# EAGLE board BSK2+BSK4 (EAGLE 9.4.2)
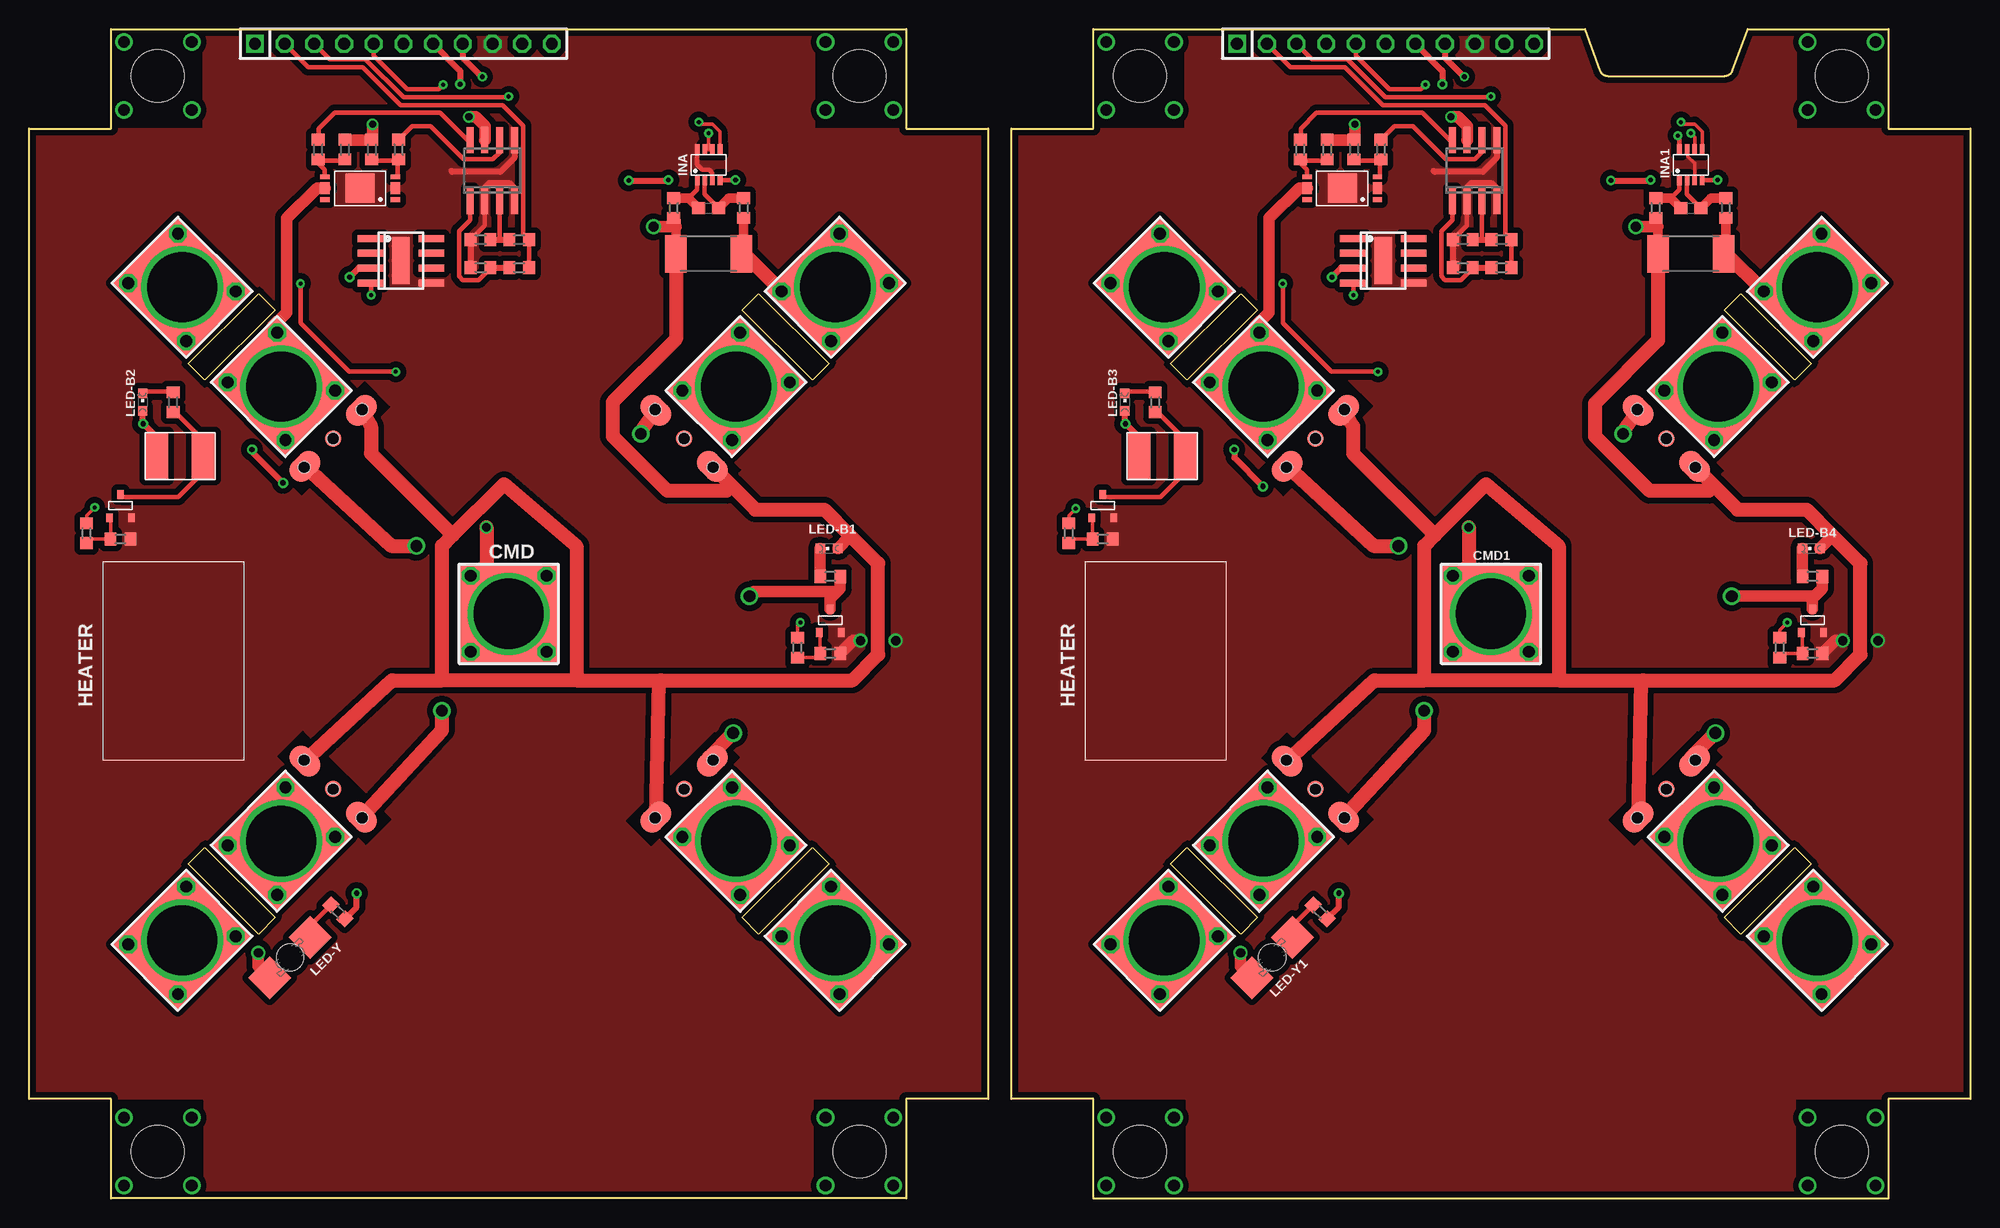
[diagram p0: board, top side]
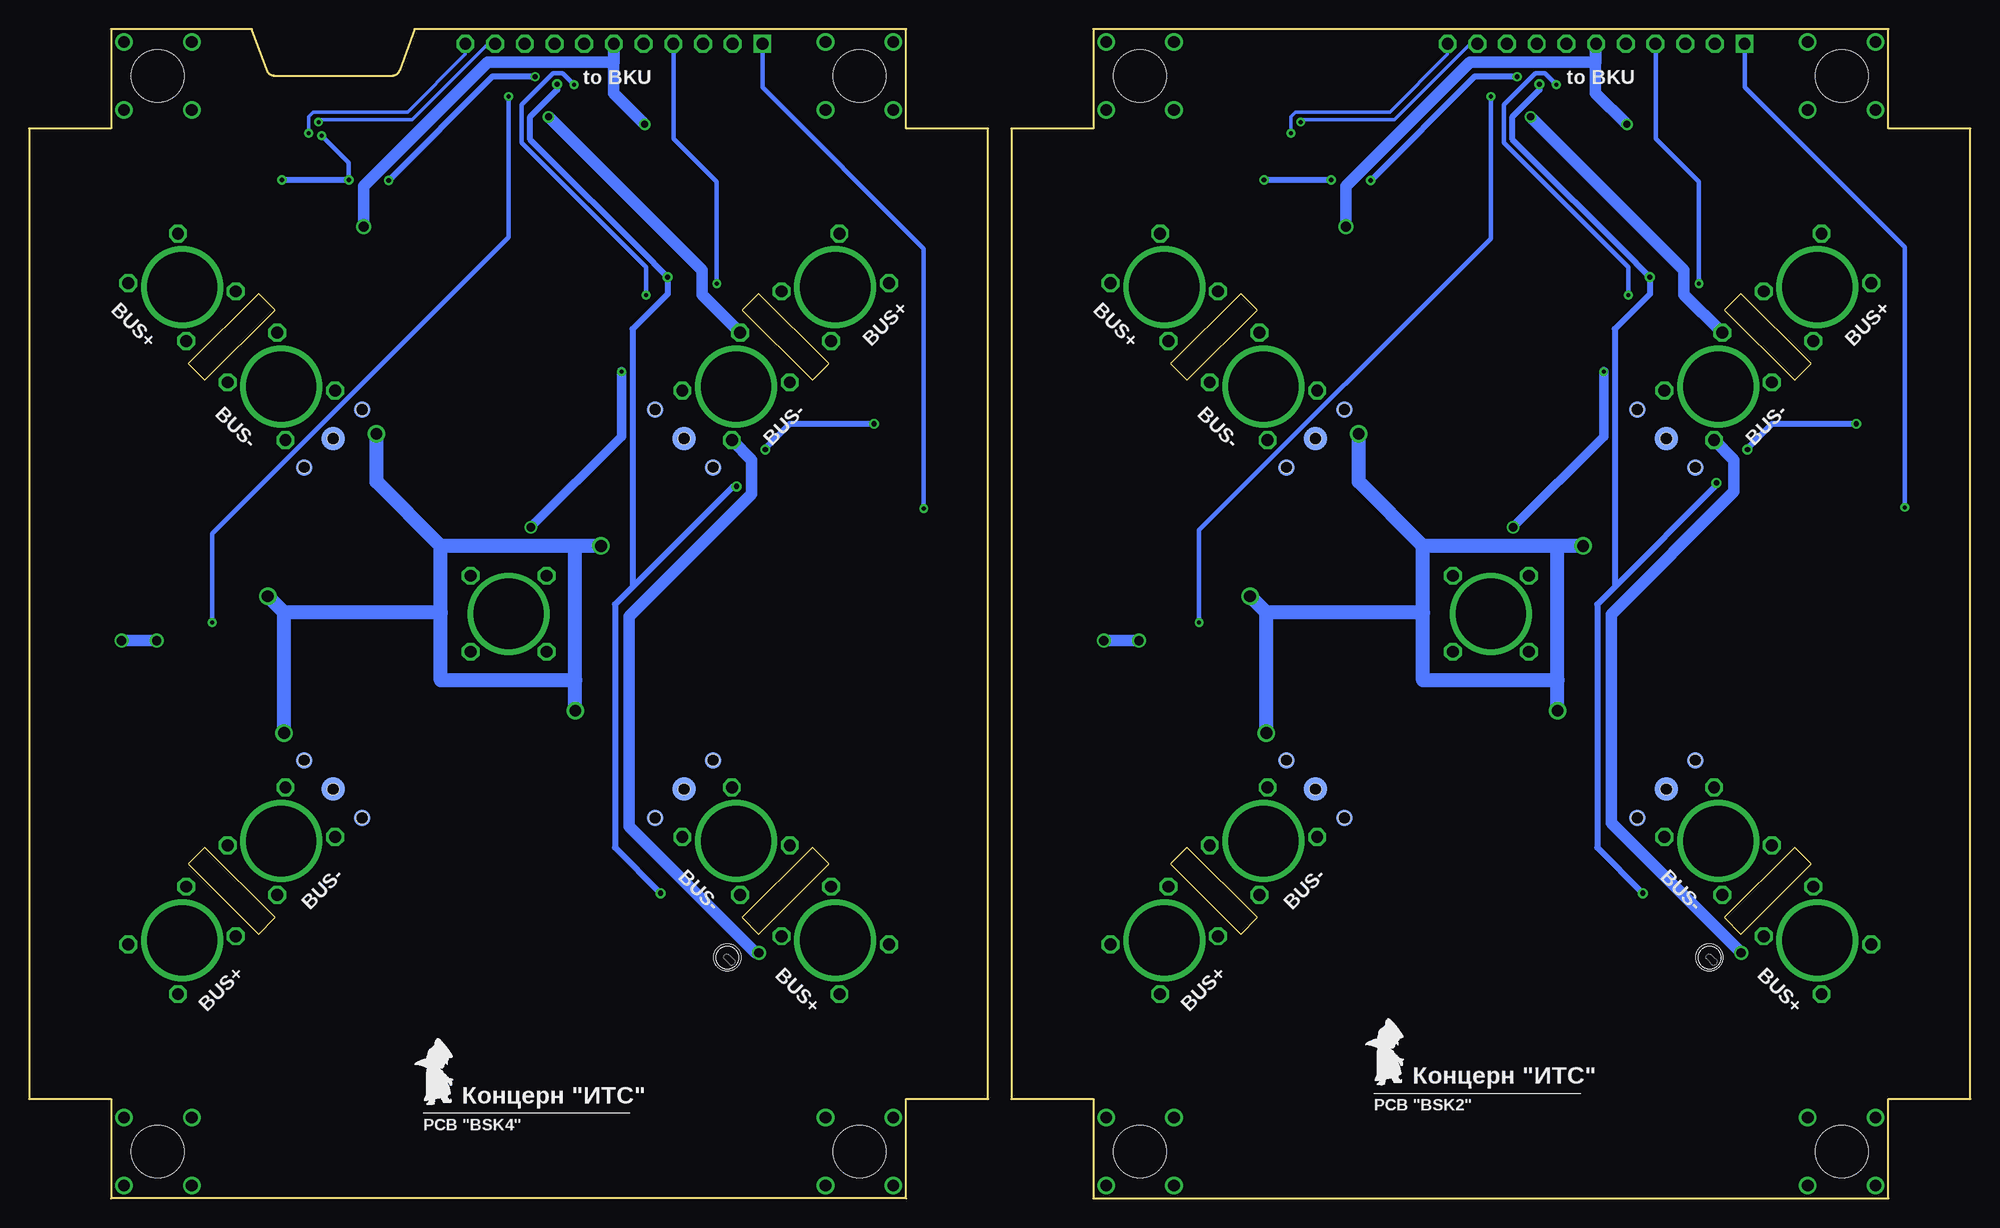
[diagram p1: board, bottom side, seen from below]

Size 166 x 100 mm. Coordinates in mm from the lower left corner, seen from the top.
Outline: 0,8.5 0,91.5 7,91.5 7,100 75,100 75,91.5 82,91.5 82,8.5 75,8.5 75,0 7,0 7,8.5 0,8.5
Outline: 60.98,24.01 66.99,30.02 68.4,28.61 62.39,22.6 60.98,24.01
Outline: 13.6,71.39 19.61,77.4 21.02,75.99 15.01,69.98 13.6,71.39
Outline: 66.99,69.98 60.98,75.99 62.39,77.4 68.4,71.39 66.99,69.98
Outline: 19.61,22.6 13.6,28.61 15.01,30.02 21.02,24.01 19.61,22.6
Outline: 84,8.5 84,91.5 91,91.5 91,100 133.04,100 134.33,96.47 arc70 135,96 145,96 arc70 145.67,96.47 146.96,100 159,100 159,91.5 166,91.5 166,8.5 159,8.5 159,0 91,0 91,8.5 84,8.5
Outline: 144.98,24.01 150.99,30.02 152.4,28.61 146.39,22.6 144.98,24.01
Outline: 97.6,71.39 103.61,77.4 105.02,75.99 99.01,69.98 97.6,71.39
Outline: 150.99,69.98 144.98,75.99 146.39,77.4 152.4,71.39 150.99,69.98
Outline: 103.61,22.6 97.6,28.61 99.01,30.02 105.02,24.01 103.61,22.6
Copper layers (1*16): Top 0.035mm / dielectric 0.93mm / Bottom 0.035mm
Design rules "default *": minimum track width 0.2mm, minimum drill 0.35mm, track to track 0.2mm, track to pad 0.2mm, pad to pad 0.2mm, via to via 0.2mm, smd to smd 0.2mm, copper to edge 0.25mm, drill to drill 0.2mm, minimum pad ring 0.2mm, minimum via ring 0.2mm, stop-mask expansion 2mil, vias tented up to drill 0mil, thermal gap 10mil
Holes 4.5 mm at 11,4 71,4 71,96 11,96 95,4 155,4 155,96 95,96

## Footprints (pad centres in the part's own frame; a part is rotated, then mirrored left to right if it is on the bottom)
1X11 = drill 1.016 square: 1 -12.7,0 | drill 1.016 octagon: 2 -10.16,0; 3 -7.62,0; 4 -5.08,0; 5 -2.54,0; 6 0,0; 7 2.54,0; 8 5.08,0; 9 7.62,0; 10 10.16,0; 11 12.7,0
C0603 = smd 1.1 x 1: 1 -0.85,0; 2 0.85,0
KCONNECT_QUAD = drill 1.016 octagon: 1 -3.25,-3.25; 2 -3.25,3.25; 3 3.25,-3.25; 4 3.25,3.25 | drill 6: P$1 0,0 | smd 8.5 x 8.5: P$2 0,0
SOIC8+HEAT_S = smd 0.6 x 2.2: 1 -1.905,-2.6; 2 -0.635,-2.6; 3 0.635,-2.6; 4 1.905,-2.6; 5 1.905,2.6; 6 0.635,2.6; 7 -0.635,2.6; 8 -1.905,2.6 | smd 4 x 1.5: HEAT 0,0
SOT23-8 = smd 0.9 x 0.4: 1 -1.3,0.975; 2 -1.3,0.325; 3 -1.3,-0.325; 4 -1.3,-0.975; 5 1.3,-0.975; 6 1.3,-0.325; 7 1.3,0.325; 8 1.3,0.975
CHIPLED_0603 = smd 0.8 x 0.8: A 0,-0.75; C 0,0.75
P47F-BOTTOM = smd 2.6 x 2.6: A -2.45,0; C 2.45,0 | hole 2.3: 0,0
SOIC8 = smd 0.6 x 2.2: 1 -1.905,-2.6; 2 -0.635,-2.6; 3 0.635,-2.6; 4 1.905,-2.6; 5 1.905,2.6; 6 0.635,2.6; 7 -0.635,2.6; 8 -1.905,2.6
R0603 = smd 1 x 1.1: 1 -0.85,0; 2 0.85,0
R2512 = smd 1.8 x 3.2: 1 -2.8,0; 2 2.8,0
KCONNECT = drill 1.016 octagon: 1 -3,-3.5; 2 -3,3.5; 3 3,-3.5; 4 3,3.5 | drill 6: P$1 0,0 | smd 8 x 9: P$2 0,0
GRAFIT4_2 = smd 2 x 2 bottom: OUT 0,0 | smd 2 x 2.9: P$1 0,3.4; P$2 0,-3.4 | smd 1.4 x 1.4: P$3 0,0 | smd 1.4 x 1.4 bottom: P$4 0,3.5; P$5 0,-3.5 | hole 1: 0,3.5; 0,0; 0,-3.5
SOT23-3 = smd 0.56 x 0.73: 1 -0.95,-1; 2 0.95,-1; 3 0,1
EM_HEAT = smd 2 x 4: 1 -2,0; 2 2,0
FS8205A+ = smd 0.4 x 0.8: 1 -0.975,-3; 4 0.975,-3; 5 0.975,3; 8 -0.975,3 | smd 1.05 x 0.8: 23 0,-3; 67 0,3 | smd 2.5 x 2.5: HEAT 0,0

## Placement (x,y rotation side)
BKU  [1X11]  32,98.75 0 top
BKU1  [1X11]  116,98.75 0 top
C1  0,1µ  [C0603]  142.1,84.7 0 top
C41  0,1µ  [C0603]  58.1,84.7 0 top
CMD  KCONNECTQUAD  [KCONNECT_QUAD]  41,50 0 top
CMD1  KCONNECTQUAD  [KCONNECT_QUAD]  125,50 0 top
DS18B20Z1  DS18B20Z  [SOIC8+HEAT_S]  31.8,80.2 270 top
DS18B20Z2  DS18B20Z  [SOIC8+HEAT_S]  115.8,80.2 270 top
INA  INA219AID  [SOT23-8]  58.1,88.4 90 top
INA1  INA219AID  [SOT23-8]  142.1,88.4 90 top
LED-B1  [CHIPLED_0603]  68.4,55.6 90 top
LED-B2  [CHIPLED_0603]  9.7,68.1 0 top
LED-B3  [CHIPLED_0603]  93.7,68.1 0 top
LED-B4  [CHIPLED_0603]  152.4,55.6 90 top
LED-Y  LAP4-BOTTOM  [P47F-BOTTOM]  22.3,20.6 225 top
LED-Y1  LAP4-BOTTOM  [P47F-BOTTOM]  106.3,20.6 225 top
MOCD  MOCD  [SOIC8]  39.6,87.9 0 top
R1  2k26  [R0603]  41.9,79.6 0 top
R2  2k26  [R0603]  41.9,82 0 top
R3  100R  [R0603]  65.7,47.1 90 top
R4  2k  [R0603]  26.4,24.5 135 top
R5  100R  [R0603]  24.7,89.7 90 top
R6  100k  [R0603]  27,89.7 270 top
R7  2k  [R0603]  12.3,68.1 270 top
R8  1M  [R0603]  7.8,56.4 0 top
R9  100R  [R0603]  31.6,89.7 90 top
R10  200k  [R0603]  122.6,79.6 0 top
R11  200k  [R0603]  122.6,82 0 top
R12  100k  [R0603]  29.3,89.7 90 top
R13  3k3  [R0603]  68.5,53.2 0 top
R14  1M  [R0603]  68.5,46.6 0 top
R15  100R  [R0603]  115.6,89.7 90 top
R16  100R  [R0603]  108.7,89.7 90 top
R17  100k  [R0603]  111,89.7 270 top
R18  100k  [R0603]  113.3,89.7 90 top
R19  2k  [R0603]  110.4,24.5 135 top
R20  2k  [R0603]  96.3,68.1 270 top
R21  1M  [R0603]  91.8,56.4 0 top
R22  3k3  [R0603]  152.5,53.2 0 top
R23  1M  [R0603]  152.5,46.6 0 top
R24  R01  [R2512]  142.1,80.8 180 top
R25  10R  [R0603]  139.1,84.7 90 top
R26  10R  [R0603]  145.1,84.7 90 top
R27  2k26  [R0603]  125.9,79.6 0 top
R28  2k26  [R0603]  125.9,82 0 top
R29  100R  [R0603]  88.9,56.9 90 top
R30  100R  [R0603]  149.7,47.1 90 top
R32  100R  [R0603]  4.9,56.9 90 top
R75  R01  [R2512]  58.1,80.8 180 top
R76  10R  [R0603]  55.1,84.7 90 top
R77  10R  [R0603]  61.1,84.7 90 top
R94  200k  [R0603]  38.6,79.6 0 top
R95  200k  [R0603]  38.6,82 0 top
U$1  KCONNECT  [KCONNECT]  13.07,77.93 45 top
U$2  KCONNECT  [KCONNECT]  21.55,69.44 45 top
U$3  KCONNECT  [KCONNECT]  68.93,77.93 315 top
U$4  KCONNECT  [KCONNECT]  60.45,69.44 315 top
U$5  KCONNECT  [KCONNECT]  97.07,77.93 45 top
U$6  GRAFITGRAFIT4_2  [GRAFIT4_2]  56,65 45 top
U$7  GRAFITGRAFIT4_2  [GRAFIT4_2]  26,65 135 top
U$8  SI2302CDS  [SOT23-3]  7.8,59.2 0 top
U$9  KCONNECT  [KCONNECT]  13.07,22.07 135 top
U$10  KCONNECT  [KCONNECT]  21.55,30.55 135 top
U$11  KCONNECT  [KCONNECT]  68.93,22.07 225 top
U$12  KCONNECT  [KCONNECT]  60.45,30.55 225 top
U$13  SI2302CDS  [SOT23-3]  68.5,49.4 0 top
U$14  EM_HEAT  [EM_HEAT]  12.9,63.5 0 top
U$15  GRAFITGRAFIT4_2  [GRAFIT4_2]  56,35 315 top
U$16  GRAFITGRAFIT4_2  [GRAFIT4_2]  26,35 225 top
U$17  PCB "BSK2"  [ITS-LOGO]  51,9 0 bottom
U$18  KCONNECT  [KCONNECT]  105.56,30.55 135 top
U$19  KCONNECT  [KCONNECT]  152.93,22.07 225 top
U$20  KCONNECT  [KCONNECT]  144.44,30.55 225 top
U$21  KCONNECT  [KCONNECT]  105.56,69.44 45 top
U$22  KCONNECT  [KCONNECT]  152.93,77.93 315 top
U$23  KCONNECT  [KCONNECT]  144.44,69.44 315 top
U$24  KCONNECT  [KCONNECT]  97.07,22.07 135 top
U$25  FS8205A+  [FS8205A+]  112.3,86.4 90 top
U$26  FS8205A+  [FS8205A+]  28.3,86.4 90 top
U$27  MOCD  [SOIC8]  123.6,87.9 0 top
U$28  SI2302CDS  [SOT23-3]  91.8,59.2 0 top
U$29  EM_HEAT  [EM_HEAT]  96.9,63.5 0 top
U$30  SI2302CDS  [SOT23-3]  152.5,49.4 0 top
U$31  GRAFITGRAFIT4_2  [GRAFIT4_2]  140,65 45 top
U$32  GRAFITGRAFIT4_2  [GRAFIT4_2]  110,65 135 top
U$33  GRAFITGRAFIT4_2  [GRAFIT4_2]  140,35 315 top
U$34  GRAFITGRAFIT4_2  [GRAFIT4_2]  110,35 225 top
U$35  PCB "BSK4"  [ITS-LOGO]  132.3,7.3 0 bottom

## Library data of the parts
BKU BKU1 = pinheadCS
C1 C41 = rcl; SPICEPREFIX: C
CMD CMD1 DS18B20Z1 DS18B20Z2 INA INA1 MOCD U$1-U$35 = CanCubeSat
LED-B1-LED-B4 LED-Y LED-Y1 = led
R1-R23 R25-R30 R32 R76 R77 R94 R95 = resistor
R24 R75 = rcl; SPICEPREFIX: R

## Nets
1: R7.2 U$8.3 U$14.2
1W: BKU.5 DS18B20Z1.4
1W1: BKU1.5 DS18B20Z2.4
2: R13.2 U$6.P$1 U$6.P$4 U$7.P$1 U$7.P$4 U$13.3 U$15.P$1 U$15.P$4 U$16.P$1 U$16.P$4
3: R20.2 U$28.3 U$29.2
3V1: BKU1.8 INA1.4 INA1.8
3V3: BKU.8 INA.4
4: R22.2 U$30.3 U$31.P$1 U$31.P$4 U$32.P$1 U$32.P$4 U$33.P$1 U$33.P$4 U$34.P$1 U$34.P$4
5V: BKU.7 DS18B20Z1.3 LED-B2.A R4.1 U$14.1
5V1: BKU1.7 DS18B20Z2.3 LED-B3.A R19.1 U$29.1
B2-CMD: BKU.4 CMD.1 CMD.2 CMD.3 CMD.4 CMD.P$1 CMD.P$2
B2-KHEAT: BKU.1 R32.2
B2-KVCC: BKU.2 R1.2 R2.2
B2-ROZE: BKU.3 R3.2
B4-CMD: BKU1.4 CMD1.1 CMD1.2 CMD1.3 CMD1.4 CMD1.P$1 CMD1.P$2
B4-KHEAT: BKU1.1 R29.2
B4-KVCC: BKU1.2 R27.2 R28.2
B4-ROZE: BKU1.3 R30.2
BUS+: BKU.6 LED-B1.A R6.1 R12.2 R75.2 R76.1 U$6.P$2 U$6.P$5 U$7.P$2 U$7.P$5 U$15.P$2 U$15.P$5 U$16.P$2 U$16.P$5
BUS+1: BKU1.6 LED-B4.A R17.1 R18.2 R24.2 R25.1 U$31.P$2 U$31.P$5 U$32.P$2 U$32.P$5 U$33.P$2 U$33.P$5 U$34.P$2 U$34.P$5
GND: BKU.9 DS18B20Z1.5 DS18B20Z1.HEAT INA.3 INA.8 MOCD.2 MOCD.4 MOCD.5 R8.2 R14.2 R94.1 R95.1 U$8.2 U$13.2 U$26.23 U$26.HEAT
GND4: BKU1.9 DS18B20Z2.5 DS18B20Z2.HEAT INA1.3 INA1.7 R10.1 R11.1 R21.2 R23.2 U$25.23 U$25.HEAT U$27.2 U$27.4 U$27.5 U$28.2 U$30.2
N$17: MOCD.1 R1.1 R94.2
N$18: MOCD.3 R2.1 R95.2
N$19: R8.1 R32.1 U$8.1
N$20: R3.1 R14.1 U$13.1
N$21: R16.1 R17.2 U$25.5
N$22: R15.1 R18.1 U$25.4
N$23: LED-Y1.A R19.2
N$24: LED-B3.C R20.1
N$25: LED-B4.C R22.1
N$26: R5.1 R6.2 U$26.5
N$27: R9.1 R12.1 U$26.4
N$28: LED-Y.A R4.2
N$29: LED-B1.C R13.1
N$31: LED-B2.C R7.1
N$47: C1.1 INA1.1 R25.2
N$48: C1.2 INA1.2 R26.2
N$49: R10.2 R27.1 U$27.1
N$50: R11.2 R28.1 U$27.3
N$51: R21.1 R29.1 U$28.1
N$52: R23.1 R30.1 U$30.1
N$150: C41.1 INA.1 R76.2
N$151: C41.2 INA.2 R77.2
OC1: MOCD.6 R9.2
OC2: R15.2 U$27.6
OD1: MOCD.8 R5.2
OD2: R16.2 U$27.8
SCL-TM: BKU.10 INA.5
SCL-TM1: BKU1.10 INA1.5
SDA-TM: BKU.11 INA.6 INA.7
SDA-TM1: BKU1.11 INA1.6
SP+: R75.1 R77.1 U$3.1 U$3.2 U$3.3 U$3.4 U$3.P$1 U$3.P$2
SP+1: U$1.1 U$1.2 U$1.3 U$1.4 U$1.P$1 U$1.P$2
SP+2: U$9.1 U$9.2 U$9.3 U$9.4 U$9.P$1 U$9.P$2
SP+3: U$11.1 U$11.2 U$11.3 U$11.4 U$11.P$1 U$11.P$2
SP+4: U$5.1 U$5.2 U$5.3 U$5.4 U$5.P$1 U$5.P$2
SP+5: U$24.1 U$24.2 U$24.3 U$24.4 U$24.P$1 U$24.P$2
SP+6: U$19.1 U$19.2 U$19.3 U$19.4 U$19.P$1 U$19.P$2
SP+7: R24.1 R26.1 U$22.1 U$22.2 U$22.3 U$22.4 U$22.P$1 U$22.P$2
SP-: LED-Y.C MOCD.7 U$2.1 U$2.2 U$2.3 U$2.4 U$2.P$1 U$2.P$2 U$26.67
SP-1: U$4.1 U$4.2 U$4.3 U$4.4 U$4.P$1 U$4.P$2
SP-2: U$10.1 U$10.2 U$10.3 U$10.4 U$10.P$1 U$10.P$2
SP-3: U$12.1 U$12.2 U$12.3 U$12.4 U$12.P$1 U$12.P$2
SP-4: U$23.1 U$23.2 U$23.3 U$23.4 U$23.P$1 U$23.P$2
SP-5: U$18.1 U$18.2 U$18.3 U$18.4 U$18.P$1 U$18.P$2
SP-6: U$20.1 U$20.2 U$20.3 U$20.4 U$20.P$1 U$20.P$2
SP-7: LED-Y1.C U$21.1 U$21.2 U$21.3 U$21.4 U$21.P$1 U$21.P$2 U$25.67 U$27.7

## Tracks (layer width: path | path; a pad name or v marks a point on that pad's centre or on a via)
1
  Top 0.4: 14.75,63.5 14.75,62 12.75,60 8,60 U$8.3 | 14.75,63.5 14.75,65 12.5,67.25 R7.2 | 14.75,63.5 U$14.2
1W  (via drill 0.35)
  Top 0.4: v29.25,77.25 29.25,78.25 DS18B20Z1.4 | v35.4,95.25 35,94.85 32.33,94.85 29.46,97.72 BKU.5
  Bottom 0.4: v29.25,77.25 29.25,79.65 39.9,90.3 39.9,93.55 37.2,96.25 36.4,96.25 v35.4,95.25
1W1  (via drill 0.35)
  Top 0.4: v113.25,77.25 113.25,78.25 DS18B20Z2.4 | v119.4,95.25 119,94.85 116.33,94.85 113.46,97.72 BKU1.5
  Bottom 0.4: v113.25,77.25 113.25,79.65 123.9,90.3 123.9,93.55 121.2,96.25 120.4,96.25 v119.4,95.25
2  (via drill 1)
  Top 1: R13.2 69.35,52.15 69.1,51.9 | v61.6,51.5 62,51.9 69.1,51.9 | 69.1,51.9 68.5,51.3 U$13.3
  Top 1.2: U$15.P$1 58.12,37.72 v60.2,39.8 | U$16.P$1 35.3,40.06 v35.3,41.7 | U$7.P$1 30.96,55.8 v33.1,55.8 | U$6.P$1 52.3,65.54 v52.3,65.4
  Bottom 1.2: 35.3,44.3 35.3,55.8 | 35.3,44.3 46.8,44.3 46.8,50.1 | 46.8,50.1 46.8,55.8 | v60.2,39.8 60.2,50.1 | 60.2,50.1 v61.6,51.5 | 46.8,50.1 60.2,50.1 | 35.3,55.8 46.8,55.8 | v35.3,41.7 35.3,44.3 | v33.1,55.8 35.3,55.8 | 46.8,55.8 52.3,61.3 v52.3,65.4
3
  Top 0.4: 98.75,63.5 98.75,62 96.75,60 92,60 U$28.3 | 98.75,63.5 98.75,65 96.5,67.25 R20.2 | 98.75,63.5 U$29.2
3V1  (via drill 0.35, 0.4)
  Top 0.4: INA1.4 v144.4,87.1 | INA1.8 141.12,90.78 v141,90.9
  Top 0.5: BKU1.8 121.08,97.55 122.72,95.92 v122.74,95.94 | v135.27,87.07 138.64,87.07 v138.67,87.1
  Bottom 0.4: v141,90.9 138.67,88.57 v138.67,87.1
  Bottom 0.5: v138.67,87.1 v144.4,87.1 | v122.74,95.94 126.39,95.94 v135.27,87.07
3V3  (via drill 0.4)
  Top 0.4: INA.4 v60.4,87.1
  Top 0.5: BKU.8 37.08,97.55 38.72,95.92 v38.74,95.94 | v51.27,87.07 54.64,87.07 v54.67,87.1
  Bottom 0.5: v54.67,87.1 v60.4,87.1 | v38.74,95.94 42.39,95.94 v51.27,87.07
4  (via drill 1)
  Top 1: R22.2 153.35,52.15 152.7,51.5 | v145.6,51.5 152.7,51.5 | 152.7,51.5 152.5,51.3 U$30.3
  Top 1.2: U$33.P$1 142.12,37.72 v144.2,39.8 | U$34.P$1 119.3,40.06 v119.3,41.7 | U$32.P$1 114.96,55.8 v117.1,55.8 | U$31.P$1 136.3,65.54 v136.3,65.4
  Bottom 1.2: 119.3,44.3 119.3,55.8 | 119.3,44.3 130.8,44.3 130.8,50.1 | 130.8,50.1 130.8,55.8 | v144.2,39.8 144.2,50.1 | 144.2,50.1 v145.6,51.5 | 130.8,50.1 144.2,50.1 | 119.3,55.8 130.8,55.8 | v119.3,41.7 119.3,44.3 | v117.1,55.8 119.3,55.8 | 130.8,55.8 136.3,61.3 v136.3,65.4
5V  (via drill 0.45)
  Top 0.5: R4.1 28,24.9 v28,26.1 | v21.7,61.2 19.05,63.85 v19.05,64.05 | v27.4,78.8 28.16,79.56 DS18B20Z1.3 | BKU.7 36.79,96.5 36.85,96.47 v36.85,95.3 | LED-B2.A 9.7,66.3 v9.75,66.25 10.9,65.1 U$14.1
  Bottom 0.5: v28,26.1 31.9,30 31.9,50.8 30.4,52.3 | 30.4,52.3 21.7,61 v21.7,61.2 | v36.85,95.3 36.85,94.82 39.15,92.52 39.15,90.57 28.6,80.02 28.6,80 v27.4,78.8 27.4,77.35 30.4,74.35 30.4,52.3 | v19.05,64.05 19.05,64.15 16.95,66.25 v9.75,66.25
5V1  (via drill 0.45)
  Top 0.5: R19.1 112,24.9 v112,26.1 | v105.5,60.9 103.05,63.35 v103.05,64.05 | v111.4,78.8 112.17,79.56 DS18B20Z2.3 | BKU1.7 120.79,96.5 120.85,96.47 v120.85,95.3 | LED-B3.A 93.7,66.3 v93.75,66.25 94.9,65.1 U$29.1
  Bottom 0.5: v112,26.1 115.9,30 115.9,50.8 114.4,52.3 | 114.4,52.3 105.8,60.9 v105.5,60.9 | v120.85,95.3 120.85,94.82 123.15,92.52 123.15,90.57 112.6,80.02 112.6,80 v111.4,78.8 111.4,77.35 114.4,74.35 114.4,52.3 | v103.05,64.05 103.05,64.15 100.95,66.25 v93.75,66.25
B2-CMD  (via drill 0.35, 0.7)
  Top 0.4: CMD.P$1 CMD.1 | CMD.P$1 CMD.2 | CMD.P$1 CMD.3 | CMD.P$1 CMD.4 | v31.35,70.7 27.35,70.7 23.2,74.85 v23.2,78.25
  Top 1.2: v39.1,57.4 39.1,54.1 CMD.2
  Bottom 0.4: BKU.4 26.9,98.73 26.9,90.65 23.2,86.95 v23.2,78.25
  Bottom 0.8: v39.1,57.4 31.35,65.15 v31.35,70.7
B2-KHEAT  (via drill 0.35)
  Top 0.3: R32.2 4.9,58.4 v5.6,59.1
  Bottom 0.4: v5.6,59.1 5.6,81.35 19.3,95.05 BKU.1
B2-KVCC
  Top 0.4: BKU.2 23.84,96.75 28.5,96.75 31.75,93.5 40.5,93.5 42.25,91.75 42.25,82.5 R2.2 R1.2
B2-ROZE  (via drill 0.35)
  Top 0.3: R3.2 65.7,49 v65.95,49.25
  Top 0.4: v41,94.25 40.95,94.2 32,94.2 28.75,97.45 25.68,97.45 BKU.3
  Bottom 0.4: v65.95,49.25 65.95,57.15 41,82.1 v41,94.25
B4-CMD  (via drill 0.35, 0.7)
  Top 0.4: CMD1.P$1 CMD1.1 | CMD1.P$1 CMD1.2 | CMD1.P$1 CMD1.3 | CMD1.P$1 CMD1.4 | v115.35,70.7 111.35,70.7 107.2,74.85 v107.2,78.25
  Top 1.2: v123.1,57.4 123.1,54.1 CMD1.2
  Bottom 0.4: BKU1.4 110.9,98.73 110.9,90.65 107.2,86.95 v107.2,78.25
  Bottom 0.8: v123.1,57.4 115.35,65.15 v115.35,70.7
B4-KHEAT  (via drill 0.35)
  Top 0.3: v89.5,59 88.9,58.4 R29.2
  Bottom 0.4: v89.5,59 89.5,81.25 103.3,95.05 BKU1.1
B4-KVCC
  Top 0.4: BKU1.2 107.84,96.75 112.5,96.75 115.75,93.5 124.5,93.5 126.25,91.75 126.25,82.5 R28.2 R27.2
B4-ROZE  (via drill 0.35)
  Top 0.3: v150.35,49.25 149.7,48.6 R30.2
  Top 0.4: v125,94.25 124.95,94.2 116,94.2 112.75,97.45 109.68,97.45 BKU1.3
  Bottom 0.4: v150.35,49.25 150.35,56.85 125,82.2 v125,94.25
BUS+  (via drill 0.6, 0.85)
  Top 0.4: 27,90.5 R6.1 | R12.2 29.25,90.5
  Top 0.8: R75.2 55.3,83.1 55.3,83.65 R76.1
  Top 1: v29.35,91.86 29.35,90.6 29.25,90.5 27,90.5 | 70.1,56.8 70.1,56.55 LED-B1.A | v53.4,83.1 55.3,83.1
  Top 1.2: 35.3,44.3 35.3,55.8 36.22,56.72 | 46.8,44.3 35.3,44.3 | 46.8,44.3 46.8,55.78 40.59,61.09 36.22,56.72 | 46.8,44.3 54,44.3 | 54,44.3 70.4,44.3 72.6,46.5 72.6,54.3 70.1,56.8 68,58.9 62.1,58.9 60.05,60.95 | U$7.P$2 29.22,66.02 29.22,63.72 36.22,56.72 | U$6.P$2 60.05,60.95 | U$15.P$2 53.88,44.18 54,44.3 | U$16.P$2 31.06,44.3 35.3,44.3 | R75.2 55.3,73.5 49.9,68.1 49.9,65.2 54.6,60.5 59.6,60.5 60.05,60.95
  Bottom 1: v29.35,91.86 29.38,91.86 32.05,94.52 32.05,98.7 BKU.6 32,97.19 42.8,97.19 53.4,86.59 v53.4,83.1
BUS+1  (via drill 0.6, 0.85)
  Top 0.4: 111,90.5 R17.1 | R18.2 113.25,90.5
  Top 0.8: R24.2 139.3,83.1 139.3,83.65 R25.1
  Top 1: v113.35,91.86 113.35,90.6 113.25,90.5 111,90.5 | 154.1,56.8 154.1,56.55 LED-B4.A | v137.4,83.1 139.3,83.1
  Top 1.2: 119.3,44.3 119.3,55.8 120.22,56.72 | 130.8,44.3 119.3,44.3 | 130.8,44.3 130.8,55.78 124.59,61.09 120.22,56.72 | 130.8,44.3 138,44.3 | 138,44.3 154.4,44.3 156.6,46.5 156.6,54.3 154.1,56.8 152,58.9 146.1,58.9 144.05,60.95 | U$32.P$2 113.22,66.02 113.22,63.72 120.22,56.72 | U$31.P$2 144.05,60.95 | U$33.P$2 137.88,44.18 138,44.3 | U$34.P$2 115.06,44.3 119.3,44.3 | R24.2 139.3,73.4 133.9,68 133.9,65.2 138.6,60.5 143.6,60.5 144.05,60.95
  Bottom 1: v113.35,91.86 113.38,91.86 116.05,94.52 116.05,98.7 BKU1.6 116,97.19 126.8,97.19 137.4,86.59 v137.4,83.1
GND  (via drill 0.8)
  Top 0.4: INA.8 57.12,88.4 57.55,87.97 58.15,87.97 58.4,87.72 58.4,87.13 INA.3 | MOCD.2 38.97,83.22 R95.1
  Top 0.5: MOCD.5 41.51,89 40.3,87.8 36.2,87.8 36.1,87.9 | MOCD.2 38.97,86.47 39.37,86.87 41.03,86.87 41.51,86.39 MOCD.4 | R95.1 R94.1
  Top 1: R14.2 70.45,47.7 v71.1,47.7
  Bottom 1: v71.1,47.7 v74.1,47.7
  cutout Top: 13.09,71.3 14.99,69.4 21.59,76 19.69,77.9
  pour Top (isolate 0.5, no thermals): 0,91.5 14.9,91.5 14.9,100 49.37,100 62.9,100 67.1,100 67.1,91.5 82,91.5 82,8.5 67,8.5 67,0 15,0 15,8.4 14.9,8.5 0,8.5
  cutout Top (no thermals): 21.2,62.3 28.7,69.8 30.8,67.7 23.3,60.2
GND1
  cutout Top (no thermals): 58.7,60.2 51.2,67.7 53.3,69.8 60.8,62.3
GND2
  cutout Top (no thermals): 51.1,32.3 58.6,39.8 60.7,37.7 53.2,30.2
GND3
  cutout Top (no thermals): 28.8,30.3 21.3,37.8 23.4,39.9 30.9,32.4
GND4  (via drill 0.8)
  Top 0.3: INA1.7 141.85,89.62 141.85,89.1 142.43,88.53 INA1.3
  Top 0.4: U$27.2 122.97,83.22 R11.1
  Top 0.5: U$27.5 125.5,89 124.3,87.8 120.2,87.8 120.1,87.9 | U$27.2 122.97,86.47 123.37,86.87 125.03,86.87 125.5,86.39 U$27.4 | R11.1 R10.1
  Top 1: R23.2 154.45,47.7 v155.1,47.7
  Bottom 1: v155.1,47.7 v158.1,47.7
  cutout Top: 97.09,71.3 98.99,69.4 105.59,76 103.69,77.9
  pour Top (isolate 0.5, no thermals): 84,91.5 98.9,91.5 98.9,100 133.1,100 133.1,99.5 133.5,99.1 133.5,98.4 133.8,98.1 133.8,97.5 134.2,97.1 134.2,96.6 134.8,96 145.2,96 145.8,96.6 145.8,97.1 146.1,97.4 146.1,97.9 146.4,98.2 146.4,98.7 146.7,99 146.7,99.5 146.9,99.7 146.9,100 151.1,100 151.1,91.5 166,91.5 166,8.5 151,8.5 151,0 99,0 99,8.4 98.9,8.5 84,8.5
  cutout Top (no thermals): 105.15,62.25 112.75,69.85 114.85,67.75 107.25,60.15
GND5
  cutout Top (no thermals): 142.75,60.15 135.2,67.7 137.3,69.8 144.85,62.25
GND6
  cutout Top (no thermals): 135.15,32.35 142.65,39.85 144.75,37.75 137.25,30.25
GND7
  cutout Top (no thermals): 112.8,30.3 105.45,37.65 107.55,39.75 114.9,32.4
HEAT1
  cutout Top: 60.45,24.07 62.45,22.07 68.95,28.57 66.95,30.57
HEAT2
  cutout Top: 66.93,69.45 68.93,71.45 62.43,77.95 60.43,75.95
HEAT3
  cutout Top: 19.54,22.07 21.54,24.07 15.04,30.57 13.04,28.57
HEAT4
  cutout Top: 144.45,24.07 146.45,22.07 152.95,28.57 150.95,30.57
HEAT5
  cutout Top: 150.93,69.45 152.93,71.45 146.43,77.95 144.43,75.95
HEAT6
  cutout Top: 103.54,22.07 105.54,24.07 99.04,30.57 97.04,28.57
N$1  (via drill 1)
  other vias: 68.1,6.9
N$2  (via drill 1)
  other vias: 68.1,1.1
N$3  (via drill 1)
  other vias: 73.9,1.1
N$4  (via drill 1)
  other vias: 73.9,6.9
N$5  (via drill 1)
  other vias: 8.1,98.9
N$6  (via drill 1)
  other vias: 8.1,93.1
N$7  (via drill 1)
  other vias: 13.9,93.1
N$8  (via drill 1)
  other vias: 13.9,98.9
N$9  (via drill 1)
  other vias: 68.1,98.9
N$10  (via drill 1)
  other vias: 68.1,93.1
N$11  (via drill 1)
  other vias: 8.1,6.9
N$12  (via drill 1)
  other vias: 8.1,1.1
N$13  (via drill 1)
  other vias: 13.9,1.1
N$14  (via drill 1)
  other vias: 13.9,6.9
N$15  (via drill 1)
  other vias: 73.9,93.1
N$16  (via drill 1)
  other vias: 73.9,98.9
N$17
  Top 0.4: MOCD.1 37.7,83.66 36.75,82.72 36.75,78.88 37.08,78.55 38.42,78.55 39.45,79.58 R94.2
  Top 0.5: R94.2 R1.1
N$18
  Top 0.4: MOCD.3 40.23,82.03 40.2,82
  Top 0.5: R95.2 40.2,82 R2.1
N$19
  Top 0.3: U$8.1 6.95,58.1 R8.1 5.25,56.4 R32.1
N$20
  Top 0.3: U$13.1 67.65,48.3 R14.1 67.3,46.25 R3.1
N$21
  Top 0.4: U$25.5 109.25,87.5 109.25,88 108.5,88.75 R16.1 108.75,88.75 111,88.75 R17.2
N$22
  Top 0.4: 115.5,88.75 115.5,87.5 U$25.4 | 115.5,88.75 113.5,88.75 R18.1 | 115.5,88.75 R15.1
N$23
  Top 0.4: R19.2 109.75,25 108.25,23.5 108.25,22.5 LED-Y1.A
N$24
  Top 0.4: LED-B3.C 93.75,69 96.25,69 R20.1
N$25
  Top 1: LED-B4.C R22.1
N$26
  Top 0.4: U$26.5 25.25,87.5 25.25,88 24.5,88.75 R5.1 24.75,88.75 27,88.75 R6.2
N$27
  Top 0.4: 31.5,88.75 31.5,87.5 U$26.4 | 31.5,88.75 29.5,88.75 R12.1 | 31.5,88.75 R9.1
N$28
  Top 0.4: R4.2 25.75,25 24.25,23.5 24.25,22.5 LED-Y.A
N$29
  Top 1: LED-B1.C R13.1
N$30  (via drill 1)
  other vias: 92.1,6.9
N$31
  Top 0.4: LED-B2.C 9.75,69 12.25,69 R7.1
N$32  (via drill 1)
  other vias: 92.1,1.1
N$33  (via drill 1)
  other vias: 97.9,1.1
N$34  (via drill 1)
  other vias: 97.9,6.9
N$35  (via drill 1)
  other vias: 152.1,6.9
N$36  (via drill 1)
  other vias: 152.1,1.1
N$37  (via drill 1)
  other vias: 157.9,1.1
N$38  (via drill 1)
  other vias: 157.9,6.9
N$39  (via drill 1)
  other vias: 92.1,98.9
N$40  (via drill 1)
  other vias: 92.1,93.1
N$41  (via drill 1)
  other vias: 97.9,93.1
N$42  (via drill 1)
  other vias: 97.9,98.9
N$43  (via drill 1)
  other vias: 152.1,98.9
N$44  (via drill 1)
  other vias: 152.1,93.1
N$45  (via drill 1)
  other vias: 157.9,93.1
N$46  (via drill 1)
  other vias: 157.9,98.9
N$47
  Top 0.4: INA1.1 141.12,86.28 140.4,85.55
  Top 0.8: R25.2 140.4,85.55 C1.1
N$48
  Top 0.4: INA1.2 141.78,85.88 C1.2
  Top 0.8: R26.2 143.8,85.55 C1.2
N$49
  Top 0.4: U$27.1 121.69,83.66 120.75,82.72 120.75,78.88 121.08,78.55 122.42,78.55 123.45,79.58 R10.2
  Top 0.5: R10.2 R27.1
N$50
  Top 0.4: U$27.3 124.23,82.03 124.2,82
  Top 0.5: R11.2 124.2,82 R28.1
N$51
  Top 0.3: U$28.1 90.95,58.1 R21.1 89.25,56.4 R29.1
N$52
  Top 0.3: U$30.1 151.65,48.3 R23.1 150.05,46.6 R30.1
N$150
  Top 0.4: INA.1 57.12,86.28 56.4,85.55
  Top 0.8: R76.2 56.4,85.55 C41.1
N$151
  Top 0.4: INA.2 57.77,85.88 C41.2
  Top 0.8: R77.2 59.8,85.55 C41.2
OC1
  Top 0.4: R9.2 32.75,91.7 34.35,91.7 37.15,88.9 39.65,88.9 40.25,89.5 40.25,90.5 MOCD.6
OC2
  Top 0.4: R15.2 116.75,91.7 118.35,91.7 121.15,88.9 123.65,88.9 124.25,89.5 124.25,90.5 U$27.6
OD1
  Top 0.4: R5.2 24.75,90.75 24.75,91.5 26.1,92.85 35.15,92.85 37.5,90.5 MOCD.8
OD2
  Top 0.4: R16.2 108.75,90.75 108.75,91.5 110.1,92.85 119.15,92.85 121.5,90.5 U$27.8
SCL-TM  (via drill 0.35)
  Top 0.3: v57.26,92.06 57.43,91.89 58.43,91.89 59.08,91.25 INA.5
  Bottom 0.3: BKU.10 42.76,98.75 49.25,92.26 57.06,92.26 v57.26,92.06
SCL-TM1  (via drill 0.35)
  Top 0.3: v141.26,92.06 141.43,91.89 142.43,91.89 143.07,91.25 INA1.5
  Bottom 0.3: BKU1.10 126.76,98.75 133.25,92.26 141.06,92.26 v141.26,92.06
SDA-TM  (via drill 0.35)
  Top 0.3: INA.7 58.1,89.7 | 58.1,89.7 INA.6 | v58.1,91.1 58.1,89.7
  Bottom 0.3: v58.1,91.1 58.1,92.5 57.7,92.9 49.65,92.9 44.7,97.85 BKU.11
SDA-TM1  (via drill 0.35)
  Top 0.3: v142.1,91.1 142.43,90.78 INA1.6
  Bottom 0.3: v142.1,91.1 142.1,92.5 141.7,92.9 133.65,92.9 128.7,97.85 BKU1.11
SP+
  Top 0.4: 69.5,78.75 69.5,78.5 U$3.P$2 | 69.5,78.75 69.5,82.75 U$3.2 | 69.5,78.75 73.75,78.75 U$3.4 | 69.5,78.75 U$3.P$2 | 69.25,78.25 65,78.25 U$3.1 | 69.25,78.25 69.25,74 U$3.3 | 69.25,78.25 U$3.P$2
  Top 0.8: R75.1 61.1,81 R77.1
  Top 1.2: R75.1 61.11,80.8 U$3.1
SP+1
  Top 0.4: 12.25,78.5 12.5,78.5 U$1.P$2 | 12.25,78.5 8.25,78.5 U$1.2 | 12.75,78 12.75,78.25 U$1.P$2 | 12.75,78 12.75,74 U$1.1 | 12.25,78.5 12.25,82.75 U$1.4 | 12.25,78.5 U$1.P$2 | 12.75,78 17,78 U$1.3 | 12.75,78 U$1.P$2
SP+2
  Top 0.4: 12.5,21.25 12.5,21.5 U$9.P$2 | 12.5,21.25 12.5,17.25 U$9.2 | 12.5,21.25 8.25,21.25 U$9.4 | 12.5,21.25 U$9.P$2 | 13,21.75 12.75,21.75 U$9.P$2 | 13,21.75 17,21.75 U$9.1 | 13,21.75 13,26 U$9.3 | 13,21.75 U$9.P$2
SP+3
  Top 0.4: 69.5,21.25 69.5,21.5 U$11.P$2 | 69.5,21.25 69.5,17.25 U$11.4 | 69.25,21.75 65,21.75 U$11.3 | 69.5,21.25 73.75,21.25 U$11.2 | 69.5,21.25 U$11.P$2 | 69.25,21.75 69.25,26 U$11.1 | 69.25,21.75 U$11.P$2
SP+4
  Top 0.4: 96.25,78.5 96.5,78.5 U$5.P$2 | 96.25,78.5 92.25,78.5 U$5.2 | 96.75,78 96.75,78.25 U$5.P$2 | 96.75,78 96.75,74 U$5.1 | 96.25,78.5 96.25,82.75 U$5.4 | 96.25,78.5 U$5.P$2 | 96.75,78 101,78 U$5.3 | 96.75,78 U$5.P$2
SP+5
  Top 0.4: 96.5,21.25 96.5,21.5 U$24.P$2 | 96.5,21.25 96.5,17.25 U$24.2 | 96.5,21.25 92.25,21.25 U$24.4 | 96.5,21.25 U$24.P$2 | 97,21.75 96.75,21.75 U$24.P$2 | 97,21.75 101,21.75 U$24.1 | 97,21.75 97,26 U$24.3 | 97,21.75 U$24.P$2
SP+6
  Top 0.4: 153.5,21.25 153.5,21.5 U$19.P$2 | 153.5,21.25 153.5,17.25 U$19.4 | 153.25,21.75 149,21.75 U$19.3 | 153.5,21.25 157.75,21.25 U$19.2 | 153.5,21.25 U$19.P$2 | 153.25,21.75 153.25,26 U$19.1 | 153.25,21.75 U$19.P$2
SP+7
  Top 0.4: 153.5,78.75 153.5,78.5 U$22.P$2 | 153.5,78.75 153.5,82.75 U$22.2 | 153.5,78.75 157.75,78.75 U$22.4 | 153.5,78.75 U$22.P$2 | 153.25,78.25 149,78.25 U$22.1 | 153.25,78.25 153.25,74 U$22.3 | 153.25,78.25 U$22.P$2
  Top 0.8: R24.1 145.1,81 R26.1
  Top 1.2: R24.1 145.11,80.8 U$22.1
SP-  (via drill 0.6, 0.8)
  Top 0.4: U$2.2 16.5,70.25 21,70.25 U$2.P$2 | 21.5,69.75 21.25,69.75 U$2.P$2 | 21.5,69.75 25.5,69.75 U$2.3 | 21.5,69.75 21.5,69.4 21.5,65.5 U$2.1 | 21.5,69.75 U$2.P$2
  Top 1: MOCD.7 38.99,90.53 38.99,91.69 38.19,92.5 v37.6,92.5 | v19.6,21 19.6,19.84 LED-Y.C | U$26.67 25.27,86.42 24.61,86.42 22.02,83.84 22.02,75.77 20.75,74.5 20.75,70.25 U$2.P$2 | U$2.P$2 21.5,69.4 | U$2.P$2 21.2,69.8 U$2.4
  Bottom 1: v37.6,92.5 24.48,79.38 24.48,77.32 U$2.4 | v19.6,21 30.7,32.1 30.7,49.96 20.21,60.45 20.21,63.15 U$2.1
SP-1
  Top 0.4: 60.75,69.5 60.75,69.75 U$4.P$2 | 60.75,69.5 60.75,65.5 U$4.3 | 60.75,69.5 56.5,69.5 U$4.1 | 60.75,69.5 U$4.P$2 | 61.5,74.5 65.5,70.5 U$4.4 | 61.5,74.5 U$4.2 | 61.5,74.5 U$4.P$2
SP-2
  Top 0.4: 20.5,25.5 16.5,29.5 U$10.4 | 20.5,25.5 U$10.2 | 20.5,25.5 U$10.P$2 | 21.25,30.5 21.25,30.25 U$10.P$2 | 21.25,30.5 21.25,34.5 U$10.3 | 21.25,30.5 25.5,30.5 U$10.1 | 21.25,30.5 U$10.P$2
SP-3
  Top 0.4: 60.75,30.25 56.5,30.25 U$12.3 | 65.5,29.5 61.5,25.5 U$12.4 | 65.5,29.5 U$12.2 | 65.5,29.5 U$12.P$2 60.75,30.25 | 60.75,30.25 60.75,34.5 U$12.1
SP-4
  Top 0.4: 144.75,69.5 144.75,69.75 U$23.P$2 | 144.75,69.5 144.75,65.5 U$23.3 | 144.75,69.5 140.5,69.5 U$23.1 | 144.75,69.5 U$23.P$2 | 145.5,74.5 149.5,70.5 U$23.4 | 145.5,74.5 U$23.2 | 145.5,74.5 U$23.P$2
SP-5
  Top 0.4: 104.5,25.5 100.5,29.5 U$18.4 | 104.5,25.5 U$18.2 | 104.5,25.5 U$18.P$2 | 105.25,30.5 105.25,30.25 U$18.P$2 | 105.25,30.5 105.25,34.5 U$18.3 | 105.25,30.5 109.5,30.5 U$18.1 | 105.25,30.5 U$18.P$2
SP-6
  Top 0.4: 144.75,30.25 140.5,30.25 U$20.3 | 149.5,29.5 145.5,25.5 U$20.4 | 149.5,29.5 U$20.2 | 149.5,29.5 U$20.P$2 144.75,30.25 | 144.75,30.25 144.75,34.5 U$20.1
SP-7  (via drill 0.6, 0.8)
  Top 0.4: U$21.2 100.5,70.25 105,70.25 U$21.P$2 | 105.5,69.75 105.25,69.75 U$21.P$2 | 105.5,69.75 109.5,69.75 U$21.3 | 105.5,69.75 105.5,69.4 105.5,65.5 U$21.1 | 105.5,69.75 U$21.P$2
  Top 1: U$27.7 123,90.53 123,91.69 122.19,92.5 v121.6,92.5 | v103.6,21 103.6,19.84 LED-Y1.C | U$25.67 109.28,86.42 108.61,86.42 106.02,83.84 106.02,75.77 104.75,74.5 104.75,70.25 U$21.P$2 | U$21.P$2 105.55,69.44 105.5,69.4 | U$21.P$2 105.2,69.8 U$21.4
  Bottom 1: v121.6,92.5 108.48,79.38 108.48,77.32 U$21.4 | v103.6,21 103.9,21 114.7,31.8 114.7,49.76 104.21,60.25 104.21,63.15 U$21.1

## Text on the board
tPlace: HEATER | HEATER
bNames: to BKU | to BKU | BUS+ | BUS+ | BUS+ | BUS+ | BUS- | BUS- | BUS- | BUS- | BUS- | BUS- | BUS- | BUS- | BUS+ | BUS+ | BUS+ | BUS+